# Allegro board ASR6601CB_FEM900_MD_V10_240315.brd
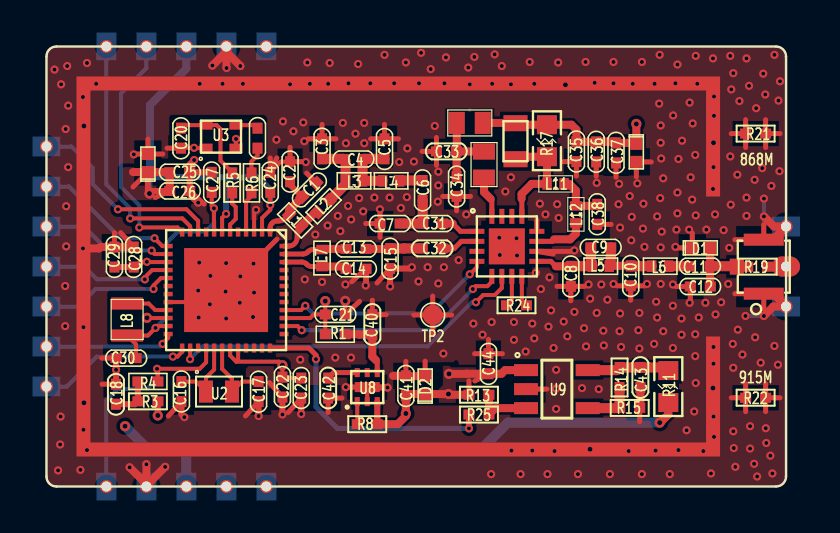
[diagram p0: board, top side]
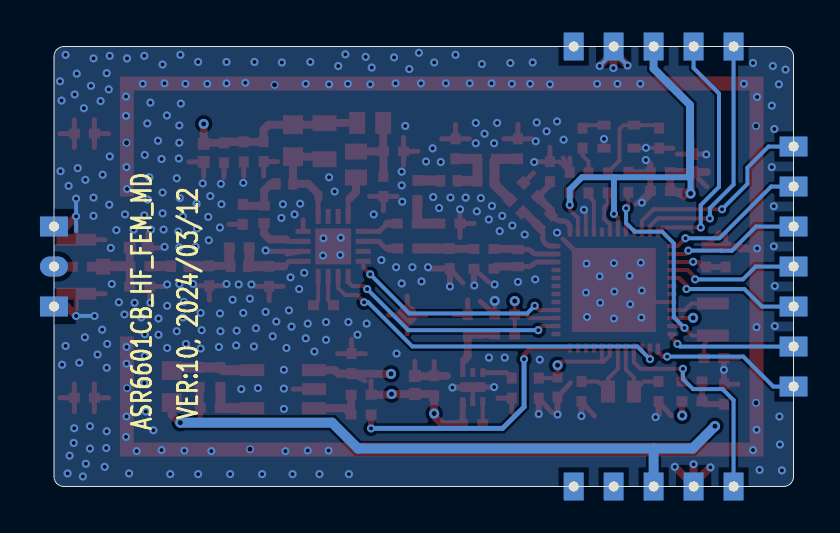
[diagram p1: board, bottom side, seen from below]

Outline 37 x 22 mm; copper layers: TOP, GND, VCC, BOTTOM. Coordinates in mm from the lower left corner of the outline.
Outline path: 0,21.5 0,0.5 arc(0.15,0.15) 0.5,0 36.5,0 arc(36.85,0.15) 37,0.5 37,21.5 arc(36.85,21.85) 36.5,22 0.5,22 arc(0.15,21.85) 0,21.5

## Placement (name value [footprint] x y rotation side)
C1  47nF  [C0402]  13.15 14.83 225 top
C2  47pF  [C0402]  12.19 15.74 270 top
C3  6.8pF  [C0402]  13.79 16.88 270 top
C4  2.7pF  [C0402]  15.36 16.38 0 top
C5  6.0pF  [C0402]  16.91 16.88 90 top
C6  12pF  [C0402]  18.82 14.8 270 top
C7  1.2pF  [C0402]  17.19 13.15 0 top
C8  NC  [C0402]  26.23 10.51 90 top
C9  1.5pF  [C0402]  27.73 11.96 0 top
C10  2.7pF  [C0402]  29.23 10.53 90 top
C11  200pF  [C0402]  32.7 11.02 0 top
C12  NC  [C0402]  32.71 10 0 top
C13  4.7pF  [C0402]  15.49 11.88 0 top
C14  2.7pF  [C0402]  15.49 10.89 0 top
C15  1pF  [C0402]  17.19 11.4 90 top
C16  NC(10pF)  [C0402]  6.75 4.75 270 top
C17  NC(10pF)  [C0402]  10.61 4.75 90 top
C18  0.1uF  [C0402]  3.47 4.62 90 top
C19  10pF  [C0402]  10.56 17.42 270 top
C20  0.1uF  [C0402]  6.73 17.42 90 top
C21  0.1uF  [C0402]  14.45 8.6 180 top
C22  2.2uF  [C0402]  11.81 4.97 270 top
C23  0.01uF  [C0402]  12.75 4.92 270 top
C24  0.1uF  [C0402]  11.2 15.21 90 top
C25  2.2uF  [C0402]  6.67 15.72 180 top
C26  0.1uF  [C0402]  6.67 14.78 180 top
C27  0.1uF  [C0402]  8.27 15.21 90 top
C28  0.1uF  [C0402]  4.36 11.47 270 top
C29  0.1uF  [C0402]  3.4 11.47 270 top
C30  0.47uF  [C0402]  3.98 6.42 180 top
C31  200pF  [C0402]  19.32 13.15 0 top
C32  200pF  [C0402]  19.3 11.9 0 top
C33  1uF  [C0402]  20.01 16.76 0 top
C34  200pF  [C0402]  20.52 15 90 top
C35  200pF  [C0402]  26.51 16.74 270 top
C36  1uF  [C0402]  27.5 16.73 270 top
C37  2.2uF  [C0402]  28.49 16.68 270 top
C38  6pF  [C0402]  27.55 13.61 270 top
C40  2.2uF  [C0402]  16.3 8.1 270 top
C41  2.2uF  [C0402]  17.98 5.03 90 top
C42  0.01uF  [C0402]  14.09 4.92 270 top
C43  2.2uF  [C0402]  29.71 5.45 90 top
C44  2.2uF  [C0402]  22.11 6.14 90 top
D1  RCLAMP0531T  [ESD1006_2N_MM]  32.76 11.93 0 top
D2  PTVS5V5D1BL  [ESD1006_2N_MM]  18.95 5.07 90 top
D4  PTVSUC3D3V3B  [ESD1006_2N_MM]  29.51 16.68 270 top
D5  PTVSUC3D3V3B  [ESD1006_2N_MM]  5.08 16.17 90 top
FB1  BLM15HD182SN1D  [L0603]  21.18 18.18 0 top
J1  HDR  [ASR6601MD_2000X3600_20N_MM]  13 11 90 top
J2  -  [IPEX]  35.89 10.99 180 top
L1  56nH  [L0402]  12.44 13.3 135 top
L2  2.3nH  [L0402]  13.86 14.01 45 top
L3  3.0nH  [L0402]  15.39 15.28 0 top
L4  7.5nH  [L0402]  17.24 15.28 0 top
L5  5.6nH  [L0402]  27.73 11.02 0 top
L6  5.6nH  [L0402]  30.7 11.02 0 top
L7  12nH  [L0402]  13.79 11.42 90 top
L8  15uH  [L2016]  4.03 8.35 270 top
L9  15nH/0603  [L0603]  21.89 16.1 90 top
L10  33nH/0805  [L2012]  23.46 17.26 90 top
L11  2.5nH  [L0402]  25.47 15.13 0 top
L12  8.7nH  [L0402]  26.49 13.61 90 top
NOREF  -  []  -68.74 -66.25 0 top
NOREF#2  -  []  -230.69 -277.83 0 top
NOREF#3  -  []  -65.56 -63.07 0 top
NOREF#4  -  []  -65.56 -63.07 0 top
NOREF#5  -  []  -68.74 -66.25 0 top
R1  0R  [R0402]  14.45 7.61 180 top
R3  10K  [R0402]  5.08 4.26 0 top
R4  0R  [R0402]  5.08 5.25 180 top
R5  0R  [R0402]  9.29 15.18 270 top
R6  10R  [R0402]  10.26 15.18 270 top
R8  10K  [R0402]  16.05 3.12 180 top
R11  0R  [R0603]  31.11 5 90 top
R13  10K  [R0402]  21.64 4.59 0 top
R14  100K  [R0402]  28.67 5.45 90 top
R15  47K  [R0402]  29.18 3.93 180 top
R17  300R/0603  [R0603]  25.04 17.29 90 top
R19  0R  [R0402]  35.58 10.99 0 top
R21  NC(0R)  [R0402]  35.48 17.65 180 top
R22  NC(0R)  [R0402]  35.48 4.44 0 top
R24  0R  [R0402]  23.52 9.06 180 top
R25  NC(1K)  [R0402]  21.64 3.6 0 top
TP2  TP_1MM  [TP_SMD100C100_MM]  19.32 8.58 0 top
U1  ASR6601QFN48  [ASR6501_QFN40P_600X600_48N_MM]  8.99 9.82 90 top
U2  XO_32.768K  [XTAL_SMD160X100_2N_MM]  8.63 4.75 0 top
U3  TCXO  [OSC_SMD200X160_4N_MM]  8.73 17.49 0 top
U4  ZD1420  [QFN50P_300X300_16N_MM]  23.03 12.01 0 top
U8  SGM2035C-3.3  [LDO_DFN50P_160X160_6N_MM]  16.05 4.97 90 top
U9  SGM2028-ADJ  [SOT95P_165X290_5N_MM]  25.55 4.87 0 top

## Library data of the parts
C1-C17 C19-C38 C40-C44 = RCL_CAP_NP
C18 = CAP
D1 D2 D4 D5 = TVS-BI
FB1 = FB
J1 = CN_6
J2 = UFLR_0
L1-L8 L11 L12 = RCL_IND
L9 L10 = INDUCTOR/SM
R1 R5 R6 R8 R11 R13-R15 R17 R21 R22 R25 = RCL_RES
R3 R4 R19 R24 = RES
TP2 = TP_SMT
U1 = ASR6505_9
U2 = XO
U3 = TCXO_1
U4 = ZD1420_4
U8 = IC-LDO-SGM2035C_0
U9 = IC-LDO-SGM2035C_3

## Footprints (pads in the part's own frame, mm; a bottom-side part is the same pattern mirrored in y, then rotated)
ASR6501_QFN40P_600X600_48N_MM
  rect 0.45x0.22 smd: 1(2.9,-2.2) 2(2.9,-1.8) 3(2.9,-1.4) 4(2.9,-1) 5(2.9,-0.6) 6(2.9,-0.2) 7(2.9,0.2) 8(2.9,0.6) 9(2.9,1) 10(2.9,1.4) 11(2.9,1.8) 12(2.9,2.2) 25(-2.9,2.2) 26(-2.9,1.8) 27(-2.9,1.4) 28(-2.9,1) 29(-2.9,0.6) 30(-2.9,0.2) 31(-2.9,-0.2) 32(-2.9,-0.6) 33(-2.9,-1) 34(-2.9,-1.4) 35(-2.9,-1.8) 36(-2.9,-2.2)
  rect 0.22x0.45 smd: 13(2.2,2.9) 14(1.8,2.9) 15(1.4,2.9) 16(1,2.9) 17(0.6,2.9) 18(0.2,2.9) 19(-0.2,2.9) 20(-0.6,2.9) 21(-1,2.9) 22(-1.4,2.9) 23(-1.8,2.9) 24(-2.2,2.9) 37(-2.2,-2.9) 38(-1.8,-2.9) 39(-1.4,-2.9) 40(-1,-2.9) 41(-0.6,-2.9) 42(-0.2,-2.9) 43(0.2,-2.9) 44(0.6,-2.9) 45(1,-2.9) 46(1.4,-2.9) 47(1.8,-2.9) 48(2.2,-2.9)
  rect 4.2x4.2 smd: 49(0,0)
ASR6601MD_2000X3600_20N_MM
  round 0.65 hole 0.5: 1(-2,-24) 3(2,-24) 4(11,2) 5(11,4) 6(11,6) 7(11,8) 8(11,10) 9(6,13) 10(4,13) 11(2,13) 12(0,13) 13(-2,13) 14(-4,13) 15(-6,13) 16(-11,10) 17(-11,8) 18(-11,6) 19(-11,4) 20(-11,2)
  oval 1x1.4 hole 0.5: 2(0,-24)
C0402
  rect 0.55x0.5 smd: 1(-0.5,0) 2(0.5,0)
ESD1006_2N_MM
  rect 0.6x0.6 smd: 1(-0.45,0) 2(0.45,0)
IPEX
  rect 2x0.6 smd: 1(0,1.35) 2(0,-1.35)
  rect 0.7x0.8 smd: 3(1.35,0)
L0402
  rect 0.47x0.58 smd: 1(-0.425,0) 2(0.425,0)
L0603
  rect 0.8x1.1 smd: 1(-0.65,0) 2(0.65,0)
L2012
  rect 0.8x1.2 smd: 1(-0.9,0) 2(0.9,0)
L2016
  rect 0.6x1.6 smd: 1(-0.8,0) 2(0.8,0)
LDO_DFN50P_160X160_6N_MM
  rect 0.45x0.25 smd: 1(-0.725,0.5) 2(-0.725,0) 3(-0.725,-0.5) 4(0.725,-0.5) 5(0.725,0) 6(0.725,0.5)
  rect 0.5x1.25 smd: 7(0,0)
OSC_SMD200X160_4N_MM
  rect 0.65x0.45 smd: 1(-0.75,-0.575) 2(0.75,-0.575) 3(0.75,0.575) 4(-0.75,0.575)
QFN50P_300X300_16N_MM
  rect 0.75x0.25 smd: 1(-1.5,0.75) 2(-1.5,0.25) 3(-1.5,-0.25) 4(-1.5,-0.75) 9(1.5,-0.75) 10(1.5,-0.25) 11(1.5,0.25) 12(1.5,0.75)
  rect 0.25x0.75 smd: 5(-0.75,-1.5) 6(-0.25,-1.5) 7(0.25,-1.5) 8(0.75,-1.5) 13(0.75,1.5) 14(0.25,1.5) 15(-0.25,1.5) 16(-0.75,1.5)
  rect 1.8x1.8 smd: 17(0,0)
R0402
  rect 0.55x0.5 smd: 1(-0.5,0) 2(0.5,0)
R0603
  rect 0.95x1 smd: 1(-0.8,0) 2(0.8,0)
SOT95P_165X290_5N_MM
  rect 1.2x0.6 smd: 1(-1.554,0.95) 2(-1.554,0) 3(-1.554,-0.95) 4(1.529,-0.95) 5(1.529,0.95)
TP_SMD100C100_MM
  round 1 smd: 1(0,0)
XTAL_SMD160X100_2N_MM
  rect 0.7x1.1 smd: 1(-0.65,0) 2(0.65,0)

## Nets
GND: C1.1 C2.1 C3.1 C5.2 C7.1 C8.1 C10.1 C12.1 C14.2 C15.1 C16.2 C17.1 C18.2 C20.1 C21.1 C22.2 C23.2 C24.2 C25.1 C26.1 C27.2 C28.1 C29.1 C30.2 C33.1 C34.1 C35.2 C36.2 C37.2 C38.2 C40.1 C41.2 C42.2 C43.1 C44.2 D1.1 D2.2 D4.2 D5.2 J1.1 J1.3 J1.5 J1.17 J2.1 J2.2 R15.1 R21.1 R21.2 R22.1 R22.2 TP2.1(TP) U1.3(GND_PLL) U1.20(GND_DCC) U1.49(GND) U3.1(GND#1) U3.2(GND#2) U4.10(GND#10) U4.12(GND#12) U4.17(EPAD) U8.2(GND) U8.7(EGND) U9.2(GND)
VBAT_IN: C41.1 C44.1 D2.1 J1.19 J1.20 R8.1 R13.1 U8.3(IN) U9.1(IN)
VCC_3V3: C21.2 C22.1 C23.1 C24.1 C25.2 C26.2 C28.2 C29.2 D5.1 J1.6 R1.2 R3.2 U1.2(VDD_IN) U1.7(VBAT_RF) U1.15(VBAT_ESD0) U1.22(VBAT_DCC) U1.31(VBAT_RTC) U1.32(VBAT_ANA) U1.39(VBAT_ESD3)
VDD_FEM: C35.1 C36.1 C37.1 D4.1 FB1.2 J1.4 J1.18 L10.2 R11.1 R17.2
VDD_FEM_ADJ: C43.2 R11.2 R14.2 U9.5(OUT)
ANT_SW_L1: U1.26(GPIO59/LORAC_RF_SW) U4.6(CTX)
GPIO00_L1: J1.9 U1.10(GPIO00/SPI_CLK)
GPIO01_L1: U1.9(GPIO01/SPI_SEL)
GPIO02_L1: J1.7 U1.12(GPIO02/SPI_MISO)
GPIO03_L1: J1.8 U1.11(GPIO03/SPI_MOSI)
GPIO04_L1: R25.1 U1.36(GPIO04/UART1_TX)
GPIO05_L1: U1.35(GPIO05/UART1_RX)
GPIO06_L1: J1.10 U1.13(GPIO06/SWD_DAT)
GPIO07_L1: J1.11 U1.14(GPIO07/SWD_CLK)
GPIO08_L1: U1.34(GPIO08/ADC_IN1)
GPIO09_L1: U1.37(GPIO09/DAC_OUT)
GPIO10_L1: U1.42(GPIO10/OPA0_OUT)
GPIO11_L1: U1.33(GPIO11/ADC_IN0)
GPIO14_L1: U1.18(GPIO14/I2C_CLK)
GPIO15_L1: U1.19(GPIO15/I2C_DAT)
GPIO16_L1: J1.12 U1.16(GPIO16/UART0_RX)
GPIO17_L1: J1.13 U1.17(GPIO17/UART0_TX)
GPIO32_L1: U1.45(GPIO32/COMP1_OUT)
GPIO33_L1: U1.44(GPIO33/COMP1_INN)
GPIO37_L1: U1.43(GPIO37/COMP1_INP)
GPIO44_L1: U1.41(GPIO44/OPA0_INN)
GPIO45_L1: U1.40(GPIO45/OPA0_INP) U4.4(CRX)
GPIO47_L1: U1.38(GPIO47/LPUART_TX) U4.5(CPS)
GPIO58_L1: U1.27(GPIO58/LP_TIMER)
GPIO60_L1: J1.15 U1.25(GPIO60/LPUART_RX)
GPIO62_L1: J1.14 U1.24(GPIO62/WKUP)
LDO_3V3: C40.2 R1.1 U8.4(OUT)
PWR_TCXO_L1: R5.2 U1.6(PWR_TCXO)
RF_TR: C11.2 C12.2 D1.2 J2.3 R19.1
RFI_N_L1: C13.1 L7.2 U1.47(RFI_N)
RFI_P_L1: C14.1 L7.1 U1.46(RFI_P)
RFO_L1: L1.1 L2.1 U1.48(RFO)
RSTN_L1: J1.16 R4.1 U1.28(RSTN)
VR_PA_L1: C1.2 C2.2 L1.2 U1.1(VR_PA)
VREG_L1: C27.1 C30.1 L8.2 U1.8(VDCC_RF) U1.23(VREG)
XO32K_IN_L1: C16.1 U1.29(XO32K_IN) U2.1(XTA)
XO32K_OUT_L1: C17.2 U1.30(XO32K_OUT) U2.2(XTB)
XTA_L1: R6.2 U1.4(XTA)
XTB_L1: U1.5(XTB)
N16777695: L8.1 U1.21(DCC_SW)
N16787701: C20.2 R5.1 U3.4(VCC)
N17165846: R13.2 R25.2 U9.3(EN)
N17167587: R14.1 R15.2 U9.4(FB)
N17193301: C18.1 R3.1 R4.2
N17221635: C42.1 U8.6(BP)
N17221684: R8.2 U8.1(EN)
N17298101: C6.2 C7.2 C31.1
N17298103: C3.2 C4.1 L2.2 L3.1
N17298114: C4.2 C5.1 L3.2 L4.1
N17303575: C31.2 U4.1(TX)
N17304129: C13.2 C15.2 C32.1
N17304356: C32.2 U4.2(RX)
N17307837: R24.1 U4.8(RX_FLT)
N17307850: R24.2 U4.7(LAN_IN)
N17307863: C8.2 C9.1 L5.1 U4.9(ANT)
N17308444: C33.2 C34.2 FB1.1 L9.2
N17310330: C38.1 L11.2 L12.2
N17310525: L10.1 L11.1 R17.1 U4.13(PA_OUT)
N17311047: L12.1 U4.11(TX_IN)
N17312417: C9.2 C10.2 L5.2 L6.1
N17312421: C11.1 L6.2
N17317836: C6.1 L4.2
N17319593: L9.1 U4.16(VCC)
N17336494: J1.2 R19.2
N17351913: C19.2 R6.1
N17352321: C19.1 U3.3(OUT)

Pads without a net: U4 3 14 15; U8 5

## Via types
v1: diameter 0.406, hole 0.203, TOP to BOTTOM, 342 vias
v2: diameter 0.508, hole 0.254, TOP to BOTTOM, 12 vias
v3: diameter 0.4, hole 0.25, TOP to BOTTOM, 6 vias

## Routing (per net, layer and track width the routed paths; a pad name or vN(x,y) marks a point on that pad's centre or on a via; arc(x,y) is an arc through that point)
GND: length 116.7
  TOP w0.2: C21.1 v2(14.95,9.28) ; v1(10.49,13.84) 10.39,13.74 U1.3 ; U3.2 v1(9.48,17.38) ; 11.2,15.72 11.72,16.24 C2.1 ; U3.1 7.4,16.92 v1(7.38,16.93) 6.74,16.93 C20.1 ; U1.20 8.39,9.22 U1.49 ; C26.1 7.17,14.51 7.49,14.19 v1(7.59,14.19) ; U8.2 U8.7
  TOP w0.25: C44.2 22.11,7.36 ; C44.2 22.81,6.64 ; C44.2 21.42,6.64 ; 12.19,16.96 C2.1 12.88,16.24 ; 14.79,4.42 C42.2 14.09,3.7 ; 29.68,3.23 R15.1 ; 12.09,3.7 C23.2 ; v1(26.41,11.8) 26.36,11.76 U4.10 25.35,11.62 ; 34.98,3.74 R22.1 ; R22.1 34.98,5.13 ; R22.1 34.26,4.44 ; 34.98,16.95 R21.2 ; R21.2 34.26,17.65 ; R21.2 34.98,18.34 ; 16.69,12.45 C7.1 ; C7.1 16.69,13.84 ; C7.1 15.97,13.15 ; 31.49,10 C12.1 32.21,9.31 ; 14.98,4.97 v1(14.98,4.97) U8.7 17.12,4.97 ; C26.1 7.89,14.12 ; C33.1 19.51,17.45 ; C33.1 18.79,16.76 ; C33.1 19.51,16.06 ; 34.44,9.64 J2.1 35.89,8.9 ; 29.23,9.31 C10.1 ; C10.1 29.93,10.03 ; C10.1 28.54,10.03 ; 19.32,7.63 TP2.1 ; TP2.1 20.27,8.58 ; TP2.1 18.38,8.58 ; TP2.1 19.32,9.52 ; R22.2 35.98,5.13 ; R22.2 36.7,4.44 ; R22.2 35.98,3.74 ; 2.76,6.42 C30.2 ; C34.1 21.21,14.5 ; C34.1 20.52,13.78 ; C34.1 19.82,14.5 ; R21.1 35.98,18.34 ; R21.1 35.98,16.95 ; R21.1 36.7,17.65 ; C3.1 14.48,17.38 ; C3.1 13.79,18.1 ; C3.1 13.09,17.38 ; C29.1 3.4,12.69 ; 17,8.6 C40.1 16.3,9.31 ; 35.89,13.09 J2.2 34.44,12.34 ; U9.2 25.04,4.87 ; 4.33,16.62 D5.2 ; D5.2 5.82,16.62 ; D5.2 5.08,17.37 ; C38.2 28.25,13.11 ; 6.03,16.92 C20.1 ; C21.1 15.67,9.26 ; C5.2 16.91,18.1 ; C5.2 16.22,17.38 ; C5.2 17.61,17.38 ; 3.71,12.69 C28.1 ; 27.5,15.51 C36.2 ; 15.27,10.23 C14.2 ; D2.2 18.95,6.27 ; 26.51,15.52 C35.2 25.82,16.24 ; C8.1 26.93,10.01 ; C8.1 25.54,10.01 ; C8.1 26.23,9.29 ; 2.78,5.12 C18.2 ; 6.1,3.53 C16.2 ; 9.96,3.53 C17.1 ; U1.49 11.53,12.37 ; 29.51,15.49 D4.2 30.25,16.23 ; U4.12 24.53,13.33 ; 31.57,11.93 D1.1 32.31,12.68 ; C41.2 17.98,6.25 ; C24.2 11.52,16.43 ; 11.2,16.43 11.2,15.72 ; 28.49,15.46 C37.2 ; 11.15,5.19 C22.2 ; 13.01,15.67 C1.1 ; 16.54,10.18 C15.1
  TOP w0.3: C14.2 15.99,10.07 v1(15.97,10.05) ; C25.1 C26.1 ; C25.1 7.17,16.1 v1(7.39,16.32) ; C25.1 8.26,15.72 C27.2 ; v1(18.28,10.97) 18.22,10.9 C15.1 v1(17.19,10) ; v1(11.81,3.6) C22.2 ; C18.2 3.48,5.12 v1(3.48,5.83) C30.2 ; v1(10.61,3.52) C17.1 ; v1(6.9,3.47) 6.75,3.62 C16.2 ; U8.7 16.07,4.95 v1(17.06,4.95) ; C23.2 v1(12.75,3.62)
  TOP w0.4: 9,20.96 9,21.72 v1(9.7,21.02) ; v1(1.82,11.9) 2.64,11.9 2.7,11.97 C29.1 C28.1 ; v1(8.3,21.05) 9,21.75 9,22 ; 5,0 5,0.04 ; 5,0.04 5,0.12 ; 5,0.04 v1(5.94,0.98) ; J2.2 36.34,12.34 J1.3 36.4,13 v1(35.89,13.51) ; 5,0.12 5,1.11 ; 5,0.12 v1(4.16,0.96) ; C43.1 29.71,3.96 R15.1 ; 17.34,5.53 C41.2 18.08,5.53 18.09,5.52 D2.2 19.05,5.52 ; v1(35.89,8.53) 36.37,9 J1.1 36.36,9.64 J2.1
  BOTTOM w0.2: 9,21.75 v1(8.3,21.05) ; 9,21.75 9,22 ; 9,21.75 9,21.72 v1(9.7,21.02) ; 35.89,12.78 v1(35.89,13.51) v1(35.89,14.39) ; v1(34.97,8.53) v1(35.89,8.53)
  vias: v1(0.4,20.85) v1(0.58,0.81) v1(0.73,20.11) v1(0.71,3.5) v1(0.68,2.1) v1(0.96,17.87) v1(0.93,10.03) v1(0.93,8.02) v1(1.04,21.02) v1(0.99,14.01) v1(0.99,12.01) v1(1.09,19.04) v1(1.09,15.97) v1(1.7,0.83) v1(1.82,19.47) v1(1.85,7.97) v1(1.85,2.84) v1(2.03,21.18) v1(2.03,1.82) v1(2.48,20.13) v1(4.37,16.6) v1(5,1.11) v1(7.67,20.13) v1(7.64,11.19) v1(7.59,9.8) v1(7.62,8.45) v1(8.2,10.53) v1(8.17,9.11) v1(8.81,20.13) v1(8.96,9.75) v1(9.01,20.92) v1(8.99,11.17) v1(8.99,8.4) v1(9.67,9.19) v1(9.7,10.51) v1(9.82,20.13) v1(10.36,11.14) v1(10.33,8.48) v1(10.38,9.7) v1(11.5,17.34) v1(11.83,18.26) v1(11.83,12.69) v1(12.19,20.11) v1(12.36,17.76) v1(12.7,6.34) v1(12.85,18.2) v1(12.9,17.26) v1(12.92,10.36) v1(13.05,21.2) v1(12.97,16.22) v1(13.18,20.13) v1(13.45,12.6) v1(13.79,10.23) v1(14.07,13.05) v1(14.17,21.18) v1(14.09,20.13) v1(14.45,6.44) v1(14.57,13.53) v1(14.7,12.77) v1(14.83,18.18) v1(14.96,10.1) v1(14.98,17.16) v1(15.11,20.16) v1(15.09,14.03) v1(15.24,13.35) v1(15.24,6.44) v1(15.46,17.64) v1(15.59,21.13) v1(15.64,14.42) v1(15.84,13.76) v1(15.9,18.18) v1(15.9,17.16) v1(16.2,20.16) v1(16.4,14.44) v1(16.68,13.86) v1(16.91,21.58) v1(17.17,14.44) v1(17.39,20.16) v1(17.65,16.22) v1(17.73,13.93) v1(17.98,21.2) v1(18.05,16.91) v1(18.03,14.47) v1(18.38,16.25) v1(18.64,20.16) v1(18.61,10.25) v1(18.74,21.68) v1(19.07,10.97) v1(19.22,20.87) v1(19.43,18.03) v1(19.6,15.74) v1(19.6,15.05) v1(19.58,14.24) v1(19.6,10.15) v1(19.86,6.65) v1(19.91,20.16) v1(19.88,10.97) v1(19.98,21.46) v1(20.62,11.32) v1(21,13.61) v1(21.1,20.95) v1(21.18,20.11) v1(21.36,8.15) v1(21.41,21.48) v1(21.81,7.59) v1(22.27,8.22) v1(22.25,0.62) v1(22.3,20.13) v1(22.42,21.61) v1(22.65,12.44) v1(22.68,11.57) v1(22.78,21.02) v1(22.96,14.75) v1(23.24,20.11) v1(23.24,15.46) v1(23.26,1.8) v1(23.39,8.22) v1(23.39,7.33) v1(23.52,12.41) v1(23.54,11.55) v1(23.72,0.62) v1(23.97,6.75) v1(24.18,21.23) v1(24.3,8.15) v1(24.3,1.8) v1(24.4,20.13) v1(24.4,7.41) v1(24.48,10.69) v1(24.68,14.14) v1(24.73,9.87) v1(24.96,13.61) v1(25.06,0.62) v1(25.17,10.46) v1(25.12,7.99) v1(25.24,8.81) v1(25.37,6.93) v1(25.42,1.77) v1(25.55,14.11) v1(25.5,5.83) v1(25.5,4.89) v1(25.5,3.88) v1(25.6,21.2) v1(25.62,13.43) v1(25.88,8.25) v1(26.06,7.51) v1(26.41,8.73) v1(26.59,0.62) v1(26.79,4.92) v1(26.97,21.23) v1(26.89,7.92) v1(27,7) v1(27.12,10.1) v1(27.2,9.39) v1(27.43,20.19) v1(27.53,15.18) v1(27.53,8.68) v1(27.63,4.87) v1(27.76,10.1) v1(27.86,7.79) v1(27.88,7.05) v1(28.06,9.34) v1(28.19,0.62) v1(28.37,21.23) v1(28.37,20.16) v1(28.37,10.13) v1(28.65,15.13) v1(28.62,14.11) v1(28.67,7.76) v1(28.7,12.95) v1(28.7,8.65) v1(28.75,6.98) v1(29.13,1.77) v1(29.18,14.52) v1(29.26,12.31) v1(29.33,20.13) v1(29.28,13.48) v1(29.56,15.16) v1(29.66,8.68) v1(29.61,7.82) v1(29.66,6.9) v1(29.79,21.23) v1(29.87,14.14) v1(29.84,12.9) v1(29.79,0.62) v1(29.92,11.98) v1(30.04,10.13) v1(30.42,20.13) v1(30.4,7.13) v1(30.55,13.51) v1(30.5,9.24) v1(30.55,8.45) v1(30.48,1.8) v1(30.65,19.14) v1(30.68,21.58) v1(30.73,18.05) v1(30.73,17.19) v1(30.75,16.4) v1(30.7,14.42) v1(30.73,11.96) v1(30.73,10.13) v1(30.86,15.41) v1(30.78,12.74) v1(30.86,7.76) v1(31.19,0.62) v1(31.35,18.55) v1(31.34,10.1) v1(31.34,9.03) v1(31.34,6.93) v1(31.47,20.16) v1(31.47,11.98) v1(31.57,21.1) v1(31.57,14.7) v1(31.57,13.66) v1(31.52,12.84) v1(31.62,16.38) v1(31.62,1.82) v1(31.77,8.4) v1(31.77,7.59) v1(31.8,17.29) v1(32.02,2.81) v1(32.15,12.84) v1(32.18,19.19) v1(32.23,15.46) v1(32.18,9.19) v1(32.33,18.15) v1(32.3,14.34) v1(32.46,16.58) v1(32.46,7.61) v1(32.46,6.52) v1(32.41,3.75) v1(32.48,21.53) v1(32.56,20.13) v1(32.48,13.56) v1(32.48,5.17) v1(32.63,8.45) v1(32.86,1.77) v1(32.96,9.19) v1(33.02,12.84) v1(33.24,0.65) v1(33.35,21.4) v1(33.37,15.97) v1(33.35,14.88) v1(33.37,6.98) v1(33.37,6.14) v1(33.37,3.5) v1(33.4,19.5) v1(33.4,18.53) v1(33.45,13.61) v1(33.47,8.6) v1(33.4,2.48) v1(33.75,9.21) v1(33.88,12.82) v1(34.16,11.93) v1(34.11,10.13) v1(34.21,21.53) v1(34.26,19.86) v1(34.21,16.5) v1(34.23,14.09) v1(34.36,20.67) v1(34.34,7.13) v1(34.36,5.94) v1(34.36,2.76) v1(34.39,1.92) v1(34.46,0.98) v1(34.56,15.59) v1(34.67,19.27) v1(34.59,7.84) v1(34.82,6.6) v1(35.02,21.4) v1(35.02,14.44) v1(35.02,13.53) v1(35.15,20.03) v1(35.2,3.01) v1(35.2,1.9) v1(35.43,15.33) v1(35.45,7.46) v1(35.4,1.14) v1(35.5,18.92) v1(35.56,0.5) v1(35.73,6.19) v1(35.86,20.64) v1(35.81,15.92) v1(35.96,19.6) v1(35.99,2.91) v1(36.01,2.18) v1(36.27,15.03) v1(36.22,1.54) v1(36.32,0.65) v1(36.42,21.58) v1(36.42,7.03) v1(36.62,19.3) v1(36.6,6.09) v1(36.7,20.26) v1(36.67,15.77) v3(1.87,18.03) v3(1.87,4.18) v3(25.96,20.08) v3(27.19,1.86) v3(33.37,17.19) v3(33.35,4.92)
VBAT_IN: length 31.2
  TOP w0.25: R13.1 21.14,5.28 ; 21.44,5.28 C44.1
  TOP w0.3: U8.3 16.55,4.06 16.55,4.06 16.55,3.39 16.55,3.39 R8.1
  TOP w0.4: v2(20.14,5.63) 21,5.63 21.01,5.64 C44.1 22.77,5.64 22.95,5.82 U9.1 ; 18.96,4.53 19.05,4.62 v2(20.11,4.62) ; R8.1 17.57,3.12 17.98,3.52 v2(17.98,3.65) C41.1 18.07,4.62 D2.1 ; R13.1 20.14,4.59 v2(20.11,4.62) ; v2(20.11,4.62) 20.18,4.62
  VCC w0.4: 11.02,2.08 17.98,2.08 ; 11.02,2.08 9.49,2.08 9,1.58 9,0 ; 11.02,2.08 11,2.06 11,0 ; 17.98,2.08 19.61,2.08 20.11,2.58 v2(20.11,4.62) ; 17.98,2.08 v2(17.98,3.65)
VCC_3V3: length 40.9
  TOP w0.2: C21.2 R1.2 ; C21.2 v2(13.95,9.27) ; C21.2 13.37,8.6 13.19,8.42 U1.39 ; 9.49,6.24 9.19,6.55 U1.31 ; 9.49,6.24 9.59,6.33 U1.32 ; 9.49,6.24 11.63,6.24 v2(11.81,6.06) C22.1 11.86,5.42 C23.1 ; 5.02,11.22 4.74,11.22 4.66,11.14 ; 5.02,11.22 U1.15 ; 5.02,11.22 v1(5.02,11.23) ; v1(8.99,13.63) 8.79,13.43 U1.7 ; U1.22 5.08,8.42 5.07,8.43 v2(5.02,8.43) ; U1.2 10.79,13.43 11.2,13.84 v1(11.2,14.08) C24.1
  TOP w0.25: 5.45,14.45 C26.2 ; 4.33,14.98 D5.1
  TOP w0.3: 5.08,15.72 D5.1 5.08,14.98 5.08,14.98 5.08,14.78 ; 5.08,14.78 C26.2 ; 5.08,14.78 5.15,14.7 v2(5.15,14.65) ; 4.66,11.14 4.49,10.97 C28.2 C29.2 ; v2(5.57,3.55) 5.58,3.56 R3.2
  TOP w0.4: C26.2 C25.2 6.16,15.72 D5.1 4.33,15.72
  VCC w0.2: 7.59,12.74 7.59,12.75 7.59,12.82
  BOTTOM w0.3: 8.94,15.46 8.99,15.41 v1(8.99,13.63) ; 8.94,15.46 5.18,15.46 5.15,15.43 v2(5.15,14.65) ; 8.94,15.46 10.59,15.46 11.2,14.85 v1(11.2,14.08)
  BOTTOM w0.4: 7,22 7,20.9 5.18,19.07 5.18,15.46
VDD_FEM: length 87.4
  TOP w0.4: C36.1 28.44,17.23 C37.1 29.46,17.18 D4.1 v2(29.51,18.13) ; C36.1 26.53,17.23 C35.1 26.51,17.84 26.27,18.09 R17.2 23.54,18.09 L10.2 23.45,18.18 FB1.2 ; C36.1 27.52,17.24 28.52,17.24 ; R11.1 31.11,3.59 30.71,3.19 v2(30.68,3.19)
  VCC w0.4: 11.02,19.12 3.88,19.12 2.66,17.9 2.66,4.28 v2(3.93,3.01) ; 11.02,19.12 11,19.14 11,22 ; 11.02,19.12 28.52,19.12 v2(29.51,18.13)
  BOTTOM w0.5: v2(3.93,3.01) 5.05,1.9 7.01,1.9 ; 7,0 7,1.89 7.01,1.9 ; 7.01,1.9 21.79,1.9 23.08,3.19 v2(30.68,3.19)
VDD_FEM_ADJ: length 4.2
  TOP w0.5: R11.2 30.95,5.95 C43.2 R14.2 28.54,5.82 U9.5
ANT_SW_L1: length 18.3
  TOP w0.2: U1.26 7.18,6.92 v1(7.18,6.37) ; v1(21.48,9.21) 21.84,9.57 22.43,9.57 22.78,9.93 U4.6 22.78,10.61
  BOTTOM w0.2: v1(7.18,6.37) 7.82,7 19.07,7 21.28,9.21 v1(21.48,9.21)
GPIO00_L1: length 10.2
  TOP w0.2: U1.10 7.59,13.28 7.01,13.86 v1(3.58,13.86)
  BOTTOM w0.2: v1(3.58,13.86) 2.31,15.13 2.31,15.94 1.25,17 J1.9
GPIO02_L1: length 12.2
  TOP w0.2: v1(4.64,12.95) 6.56,12.95 U1.12
  BOTTOM w0.2: v1(4.64,12.95) 4.64,14.06 3.73,14.98 3.73,19.65 5,20.92 5,22
GPIO03_L1: length 12.5
  TOP w0.2: U1.11 7.19,13.01 6.8,13.4 v1(4.19,13.4)
  BOTTOM w0.2: v1(4.19,13.4) 4.19,13.91 3,15.1 3,22
GPIO04_L1: length 13.8
  TOP w0.25: U1.36 13.13,6.92 13.48,6.57 v1(13.48,6.37)
  TOP w0.3: R25.1 v1(21.14,2.91)
  BOTTOM w0.25: v1(13.48,6.37) 13.48,3.98 14.56,2.91 v1(21.14,2.91)
GPIO06_L1: length 7.3
  TOP w0.2: U1.13 5.8,12.02 v1(5.41,12.41)
  BOTTOM w0.2: v1(5.41,12.41) 3.7,12.41 1.12,15 J1.10
GPIO07_L1: length 6.7
  TOP w0.2: U1.14 5.41,11.62 5.25,11.78 5.25,11.79 5.26,11.79 5.26,11.79 5.26,11.79 5.26,11.79 v1(5.26,11.79)
  BOTTOM w0.2: v1(5.26,11.8) 3.63,11.8 3.62,11.79 3.08,11.79 1.87,13 J1.11
GPIO16_L1: length 6.6
  TOP w0.2: v1(4.92,10.36) 4.92,10.46 5.29,10.82 U1.16
  BOTTOM w0.2: v1(4.92,10.36) 2.54,10.36 1.89,11 J1.12
GPIO17_L1: length 6.8
  TOP w0.2: U1.17 5.73,10.42 5.35,10.05 v1(5.35,9.87)
  BOTTOM w0.2: J1.13 1.59,9 2.46,9.87 v1(5.35,9.87)
GPIO45_L1: length 11.1
  TOP w0.2: v1(12.95,9.03) 12.74,8.82 U1.40 ; v1(21.18,10.61) 21.53,10.97 U4.4
  BOTTOM w0.2: v1(12.95,9.03) 13.33,8.65 19.22,8.65 v1(21.18,10.61)
GPIO47_L1: length 11.9
  TOP w0.2: v1(21.33,9.87) 21.48,10.02 22.06,10.02 22.28,10.24 U4.5 22.28,10.61 ; v1(12.77,7.82) 12.56,8.02 U1.38
  BOTTOM w0.2: v1(12.77,7.82) 19.27,7.82 v1(21.33,9.87)
GPIO60_L1: length 7.7
  TOP w0.2: U1.25 6.79,6.73 6.55,6.49 v1(6.32,6.49)
  BOTTOM w0.2: v1(6.32,6.49) 2.51,6.49 1.02,5 J1.15
GPIO62_L1: length 6.5
  TOP w0.2: U1.24 6.09,7.62 6.09,7.43 5.81,7.16 v1(5.81,7.13)
  BOTTOM w0.2: v1(5.81,7.13) 5.68,7 J1.14
LDO_3V3: length 3.4
  TOP w0.25: U8.4 16.55,6.25 16.48,6.32
  TOP w0.4: R1.1 15.63,7.61 15.64,7.6 C40.2 16.3,6.49 16.48,6.32
PWR_TCXO_L1: length 2.2
  TOP w0.2: U1.6 9.19,13.1 9.47,13.38 9.47,13.98 9.29,14.15 R5.2 9.29,14.73
RF_TR: length 3.8
  TOP w0.4: D1.2 33.2,11.92 C11.2 33.2,10.01 C12.2 ; R19.1 J2.3
  TOP w0.5: J2.3 34.51,11.02 C11.2
RFI_N_L1: length 3.2
  TOP w0.25: L7.2 13.33,11.85 arc(13.2,11.82) 13.1,11.75 13.06,11.72 arc(12.96,11.65) 12.84,11.62 U1.47
  TOP w0.4: L7.2 13.82,11.88 C13.1
RFI_P_L1: length 3.2
  TOP w0.25: U1.46 12.78,11.22 arc(12.9,11.2) 13.01,11.13 13.04,11.09 arc(13.15,11.02) 13.27,11 L7.1
  TOP w0.4: L7.1 14.88,11 C14.1
RFO_L1: length 2.6
  TOP w0.25: U1.48 12.12,12.02 arc(12.42,12.15) 12.54,12.44 12.54,12.69 arc(12.56,12.79) 12.62,12.88 L1.1
  TOP w0.4: L2.1 13.45,13.71 L1.1
RSTN_L1: length 11.8
  TOP w0.2: R4.1 5.58,5.84 v1(5.53,5.89) 7.67,5.89 7.99,6.21 U1.28
  BOTTOM w0.2: v1(5.53,5.89) 5.53,5.38 5.48,5.33 5.48,5.33 5.02,4.87 3.55,4.87 3,4.32 3,0
VR_PA_L1: length 3.6
  TOP w0.25: U1.1 11.19,12.94 arc(11.21,13.05) 11.28,13.15 11.31,13.19 arc(11.41,13.25) 11.53,13.28 11.63,13.28 arc(11.8,13.31) 11.94,13.41 L1.2
  TOP w0.3: C2.2 12.19,15.08 C1.2
  TOP w0.4: L1.2 12.14,13.81 C1.2
VREG_L1: length 13.6
  TOP w0.2: U1.23 5.55,8.02 v1(5.46,7.93) 5.07,7.55 L8.2 4.48,7.1 C30.1 ; U1.8 8.39,13.25 8.38,13.26 v1(8.38,13.91) 8.27,14.02 C27.1 8.27,14.76
  BOTTOM w0.2: v1(8.38,13.91) 8.38,13.17 7.95,12.74 6.57,12.74 5.99,12.16 5.99,8.46 v1(5.46,7.93)
XO32K_IN_L1: length 3.8
  TOP w0.2: C16.1 7.48,5.25 U2.1 7.98,5.44 8.39,5.84 U1.29
XO32K_OUT_L1: length 3.9
  TOP w0.2: C17.2 9.78,5.25 U2.2 9.28,5.39 8.79,5.88 U1.30
XTA_L1: length 2.1
  TOP w0.2: U1.4 9.99,14.25 10.26,14.52 R6.2 10.26,14.73
N16777695: length 2.2
  TOP w0.2: L8.1 5.11,9.15 5.44,8.82 U1.21
N16787701: length 4.6
  TOP w0.2: C20.2 6.88,18.07 U3.4 8.51,18.07 8.71,17.87 8.71,16.29 9.29,15.71 R5.1
N17165846: length 3
  TOP w0.4: R13.2 R25.2 22.46,3.92 U9.3
N17167587: length 2.6
  TOP w0.5: R14.1 28.67,3.94 R15.2 28.67,3.92 U9.4
N17193301: length 2.2
  TOP w0.3: R4.2 R3.1 4.43,4.12 C18.1
N17221635: length 1.6
  TOP w0.25: C42.1 14.37,5.7 U8.6
N17221684: length 1.1
  TOP w0.2: U8.1 R8.2
N17298101: length 2.3
  TOP w0.5: C7.2 C31.1 18.82,14.29 C6.2
N17298103: length 3.5
  TOP w0.4: 14.96,15.11 L3.1
  TOP w0.5: C3.2 14.85,16.38 C4.1 14.96,16.27 L3.1 ; L2.2 14.96,15.11
N17298114: length 3.2
  TOP w0.5: L4.1 L3.2 15.81,16.33 C4.2 15.87,16.38 C5.1
N17303575: length 1.9
  TOP w0.25: 20.33,13.15 20.72,12.76 U4.1
  TOP w0.4: 20.33,13.15 C31.2
N17304129: length 2.8
  TOP w0.4: C13.2 17.17,11.88 C15.2
  TOP w0.5: C32.1 17.9,11.9 17.89,11.9 C15.2
N17304356: length 1.9
  TOP w0.25: U4.2 20.75,12.26 20.4,11.9 20.24,11.9
  TOP w0.4: C32.2 20.24,11.9
N17307837: length 1.6
  TOP w0.2: 23.78,10.61 U4.8 23.78,9.29 R24.1
N17307850: length 1.7
  TOP w0.2: R24.2 23.28,9.33 U4.7 23.28,10.61
N17307863: length 3.9
  TOP w0.25: 25.48,11.01 25.24,11.26 U4.9
  TOP w0.4: C8.2 25.48,11.01
  TOP w0.5: C8.2 26.24,11.02 L5.1 27.23,11.09 C9.1
N17308444: length 4.1
  TOP w0.4: C33.2 21.88,16.76 L9.2 ; C33.2 20.53,16.77 FB1.1 ; C33.2 20.52,16.75 C34.2
N17310330: length 2.6
  TOP w0.4: L11.2 26.16,15.13 26.49,14.8 L12.2 27.48,14.03 C38.1
N17310525: length 5.6
  TOP w0.25: U4.13 23.78,14.37 23.77,14.39
  TOP w0.4: 23.77,14.39 23.77,14.62 24.28,15.13 L11.1 25.04,15.14 R17.1 23.59,16.49 L10.1
N17311047: length 2.7
  TOP w0.25: 25.4,12.36 25.29,12.26 U4.11
  TOP w0.4: L12.1 26.49,12.64 26.2,12.36 25.4,12.36
N17312417: length 3.1
  TOP w0.4: C10.2 28.17,11.03
  TOP w0.5: L6.1 29.25,11.02 C10.2 ; L5.2 28.23,11.09 C9.2
N17312421: length 1.1
  TOP w0.5: C11.1 L6.2
N17317836: length 1.2
  TOP w0.5: L4.2 17.68,15.3 C6.1
N17319593: length 2.1
  TOP w0.25: 22.22,14.39 22.28,14.32 U4.16
  TOP w0.4: L9.1 21.89,14.72 22.22,14.39
N17336494: length 0.9
  TOP w0.4: J1.2 36.99,10.99 R19.2
N17351913: length 1.4
  TOP w0.2: 10.56,16.91 C19.2 10.56,16.55 10.26,16.25 R6.1
N17352321: length 1.1
  TOP w0.2: C19.1 10.41,18.07 U3.3

## Copper pours and planes (outline as drawn; the poured copper is in the pictures)
GND on TOP (solid shape): 33.7,14.5 33,14.5 33,19.8 2.2,19.8 2.2,2.2 33,2.2 33,7.5 33.7,7.5 33.7,1.5 1.5,1.5 1.5,20.5 33.7,20.5
GND on TOP: 0.5,0 0.15,0.15 0,0.5 0,21.5 0.15,21.85 0.5,22 36.5,22 36.85,21.85 37,21.5 37,0.5 36.85,0.15 36.5,0 ; 7 cut-outs
GND on GND: 0.5,0 0.15,0.15 0,0.5 0,21.5 0.15,21.85 0.5,22 36.5,22 36.85,21.85 37,21.5 37,0.5 36.85,0.15 36.5,0
GND on VCC: 0.5,0 0.15,0.15 0,0.5 0,21.5 0.15,21.85 0.5,22 36.5,22 36.85,21.85 37,21.5 37,0.5 36.85,0.15 36.5,0 ; 3 cut-outs
VBAT_IN on TOP: 17.8,4.16 17.65,4.31 17.65,4.77 17.83,4.95 19.63,4.95 19.63,5.94 19.73,6.04 23.16,6.04 23.29,6.16 24.58,6.16 24.66,6.09 24.66,5.5 24.61,5.45 23.21,5.45 22.93,5.17 21.61,5.17 21.53,5.1 21.53,4.23 21.46,4.16
VCC_3V3 on TOP: 3.88,15.97 6.4,15.97 6.45,15.92 6.45,14.37 6.4,14.32 3.98,14.32 3.81,14.5 3.81,15.89
VCC_3V3 on VCC: 4.54,3.16 4.08,3.63 4.08,14.57 4.54,15.03 11.04,15.03 11.05,15.03 11.78,15.03 12.14,14.67 12.14,13.94 12.14,13.94 12.14,10.07 12.72,9.5 16.02,9.5 16.31,9.21 16.31,3.5 15.97,3.16
GND on BOTTOM: 0.5,0 0.15,0.15 0,0.5 0,21.5 0.15,21.85 0.5,22 5.13,22 5.13,21.99 6.62,21.99 6.61,22 36.5,22 36.85,21.85 37,21.5 37,0.5 36.85,0.15 36.5,0 ; 3 cut-outs

## Text on the board
Ref Des/Silkscreen Bottom: VER:10, 2024/03/12 | ASR6601CB_HF_FEM_MD
Ref Des/Silkscreen Top: 915M | 868M
User.36: FIGURE | SIZE | 0.2032 | 0.254 | 0.5 | 1.0x0.25 | DRILL CHART: TOP to BOTTOM | ALL UNITS ARE IN MILLIMETERS | TOLERANCE | +0.0254/-0.0254 | +0.0/-0.0 | PLATED | QTY | 342 | 12 | 20 | 4 | 2
User.38: PRIMARY SIDE ASSEMBLY
